# Altium PCB Power_Supply_Board.PcbDoc (part 1 of 2)
Units mm, origin at the board's own origin, x right, y up, seen from the top; angles counter-clockwise.
Board outline 32 x 28 mm, 4 copper layers (Top Layer, IN_T, IN_B, Bottom Layer), stack 1.57 mm thick; 32 components, 16 nets, 98 pads, 34 vias.
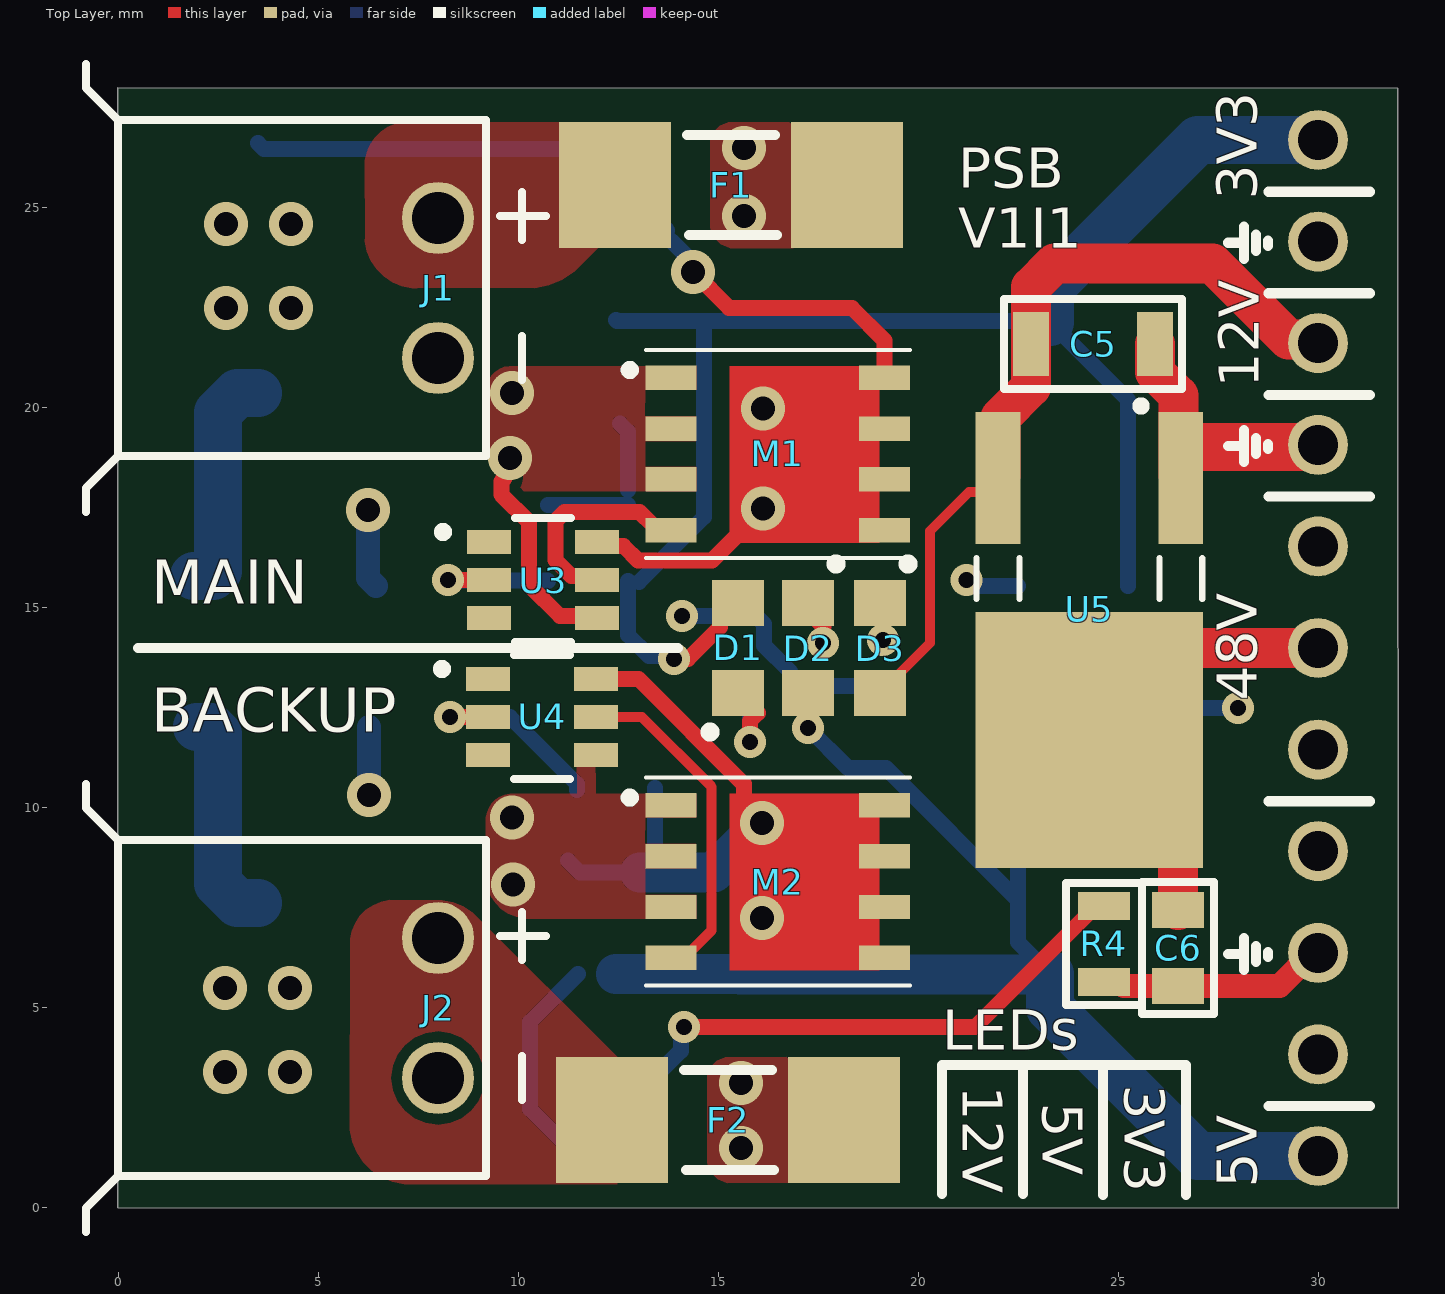
[diagram p0: Top Layer view]
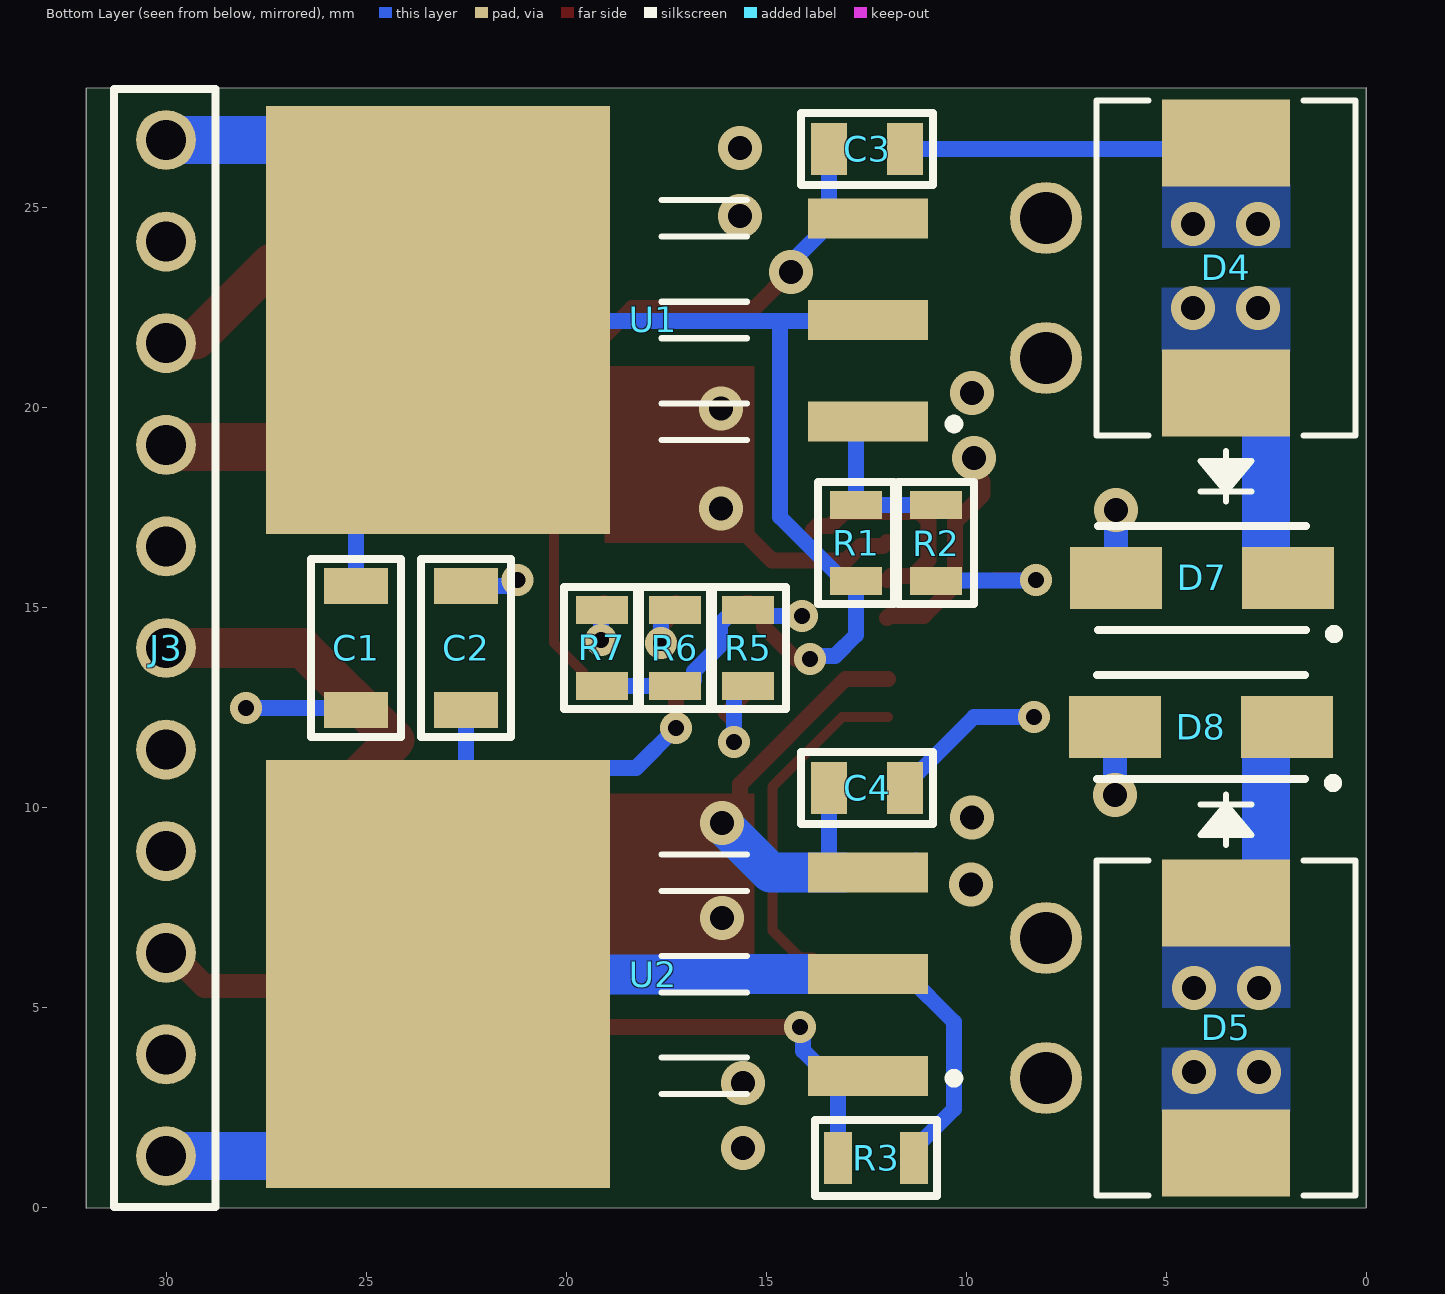
[diagram p1: Bottom Layer view, seen from below]
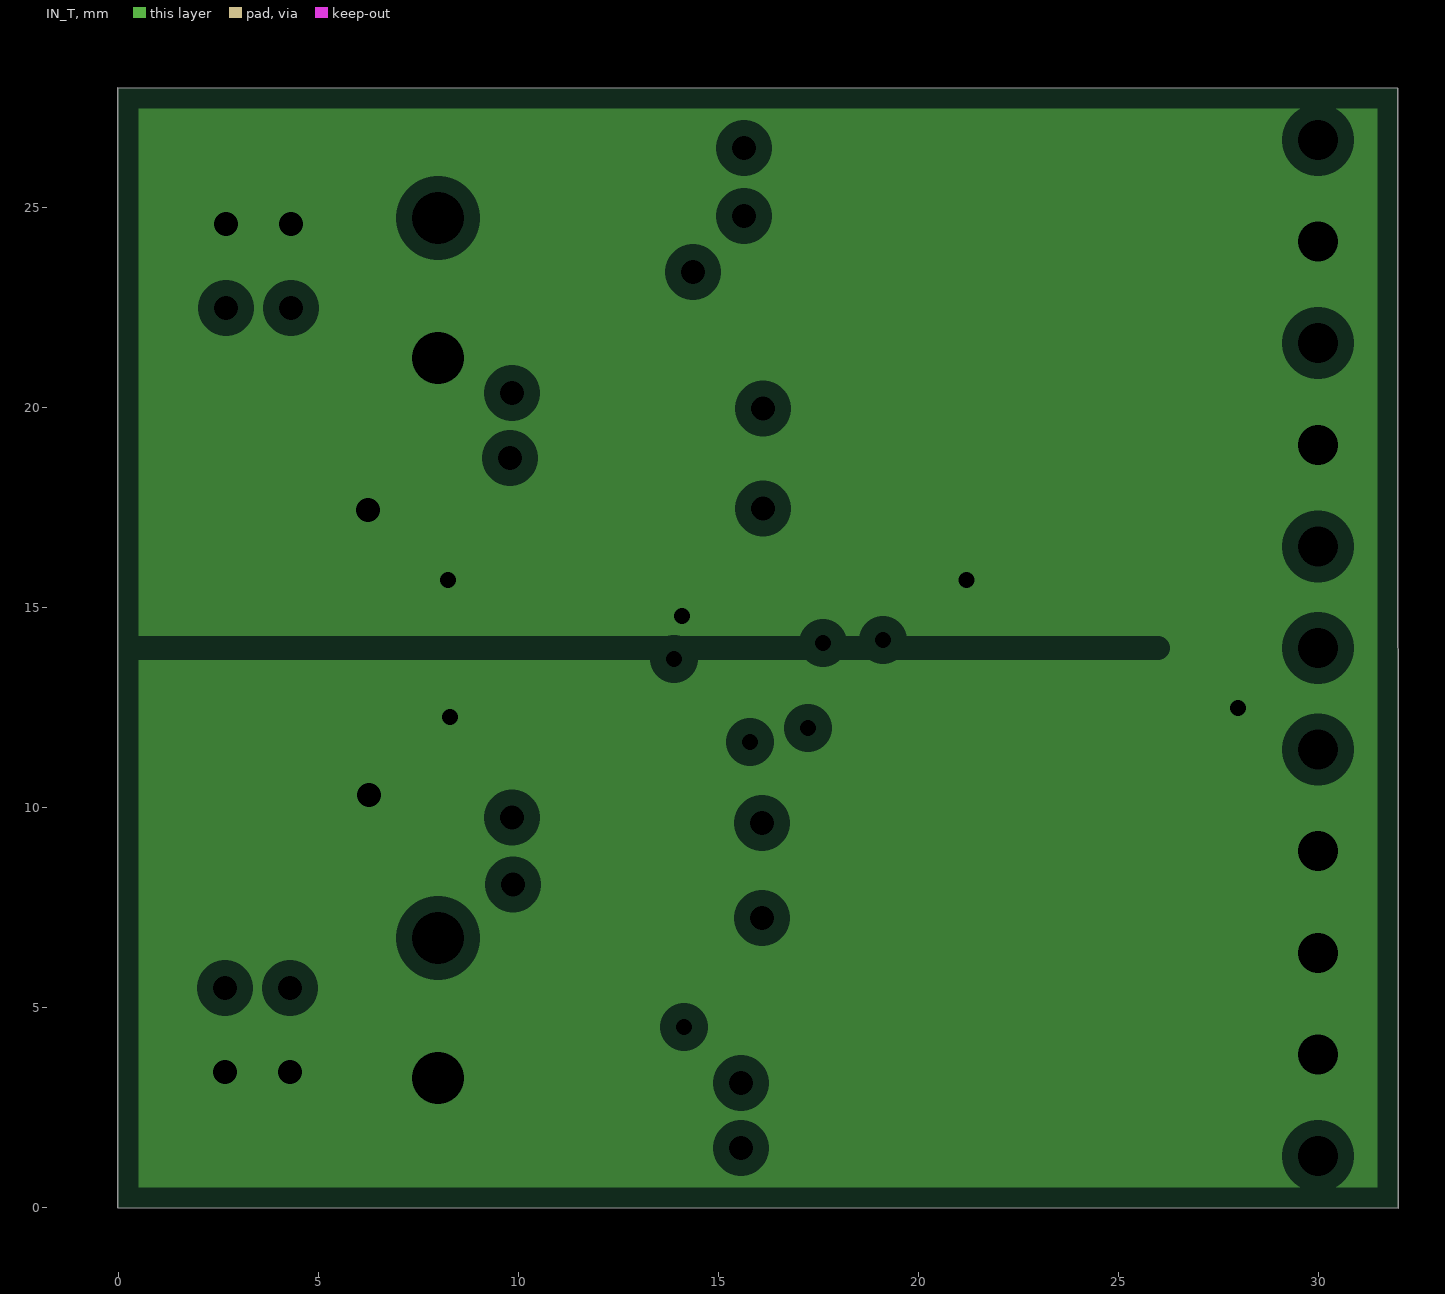
[diagram p2: IN_T, clearances drawn from the general rule]
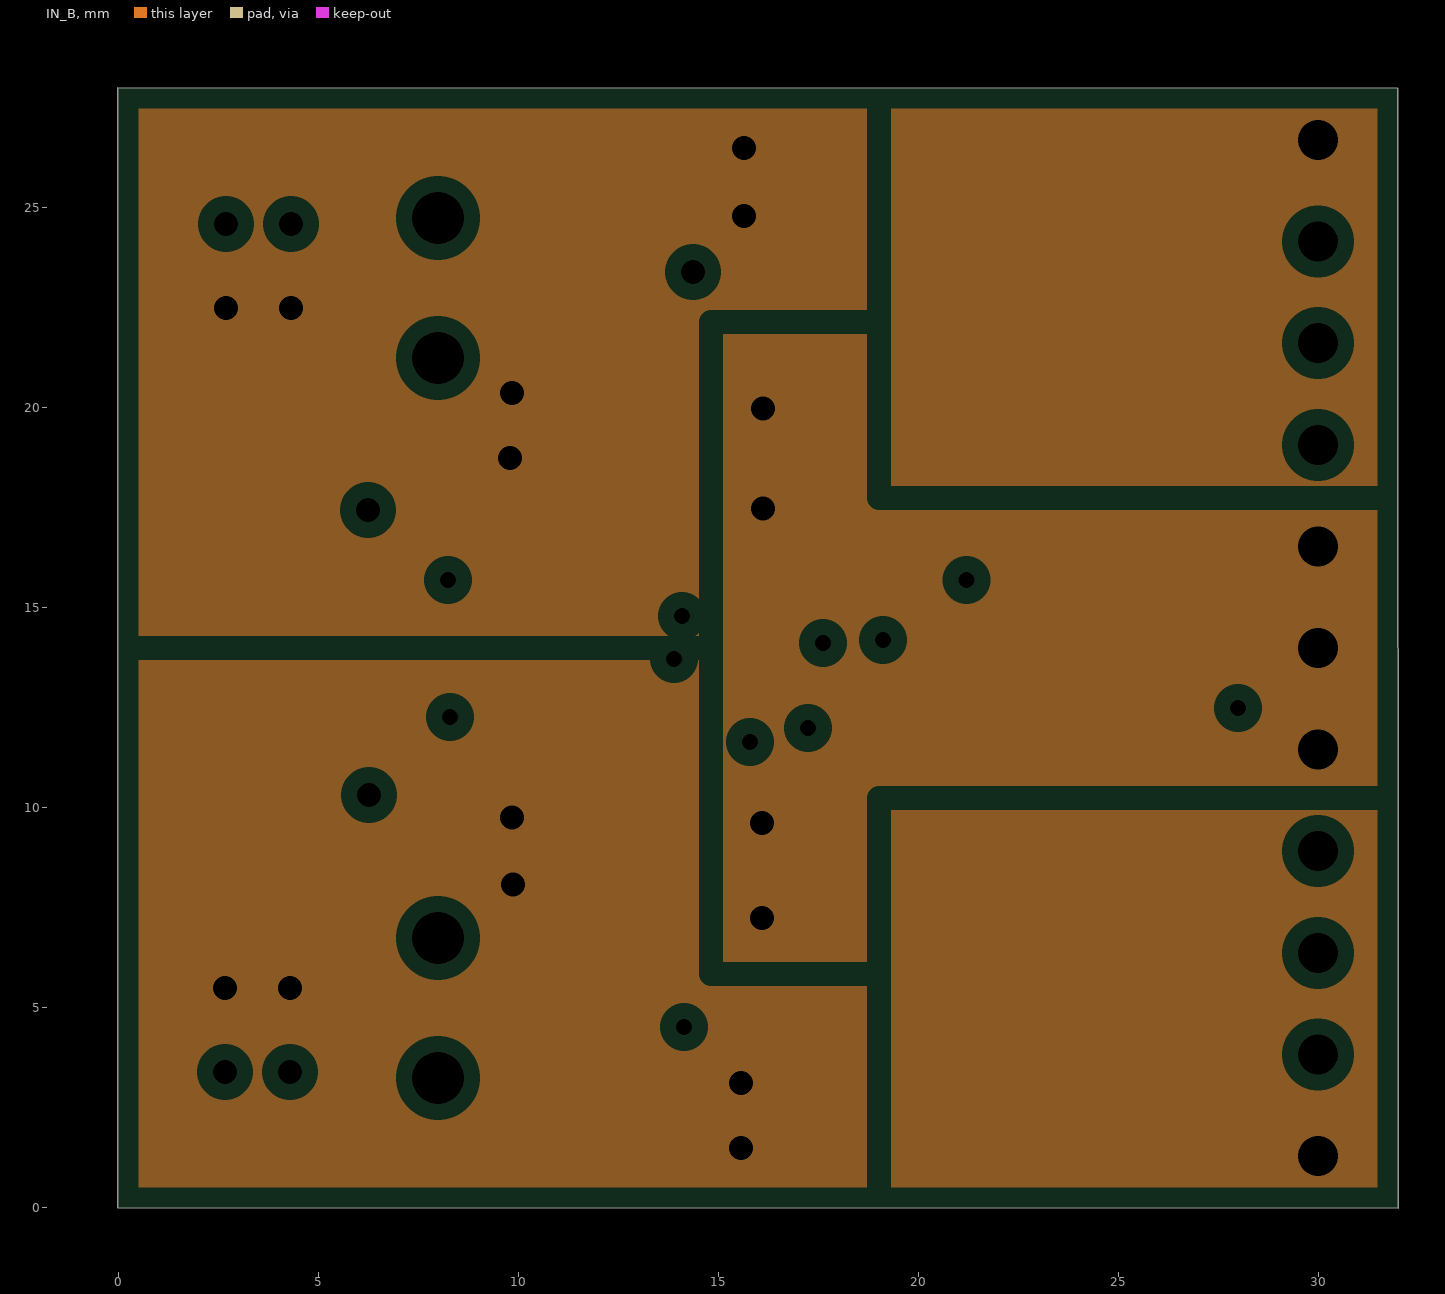
[diagram p3: IN_B, clearances drawn from the general rule]
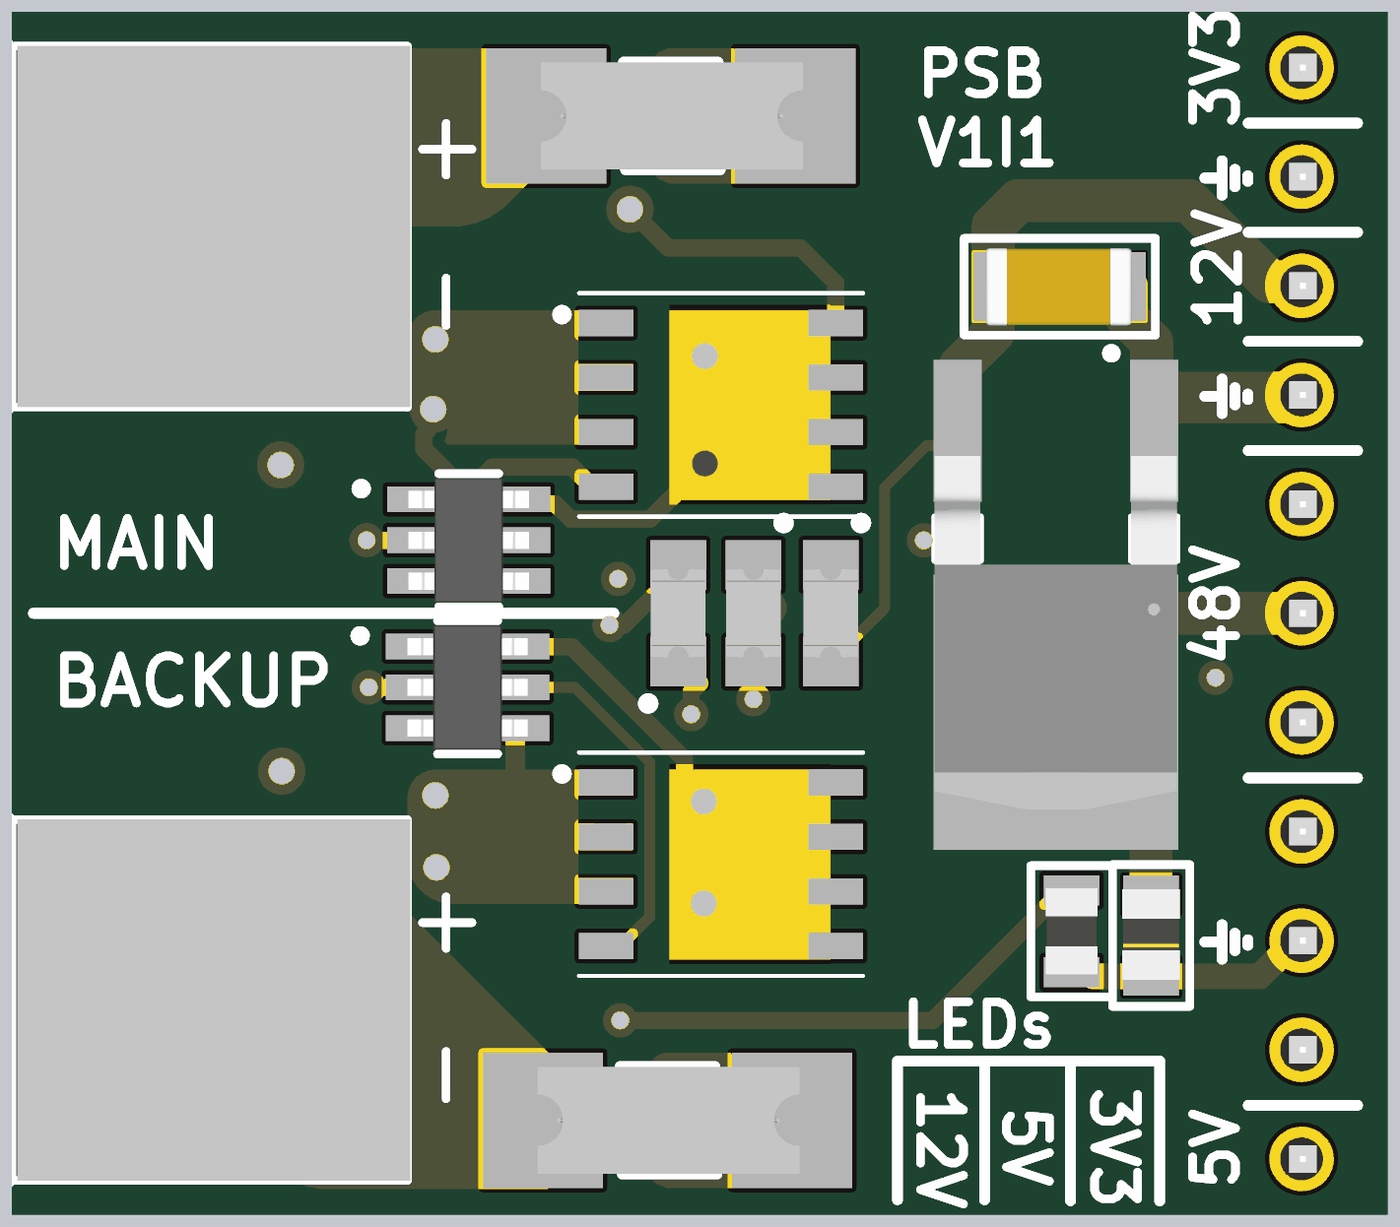
[diagram p4: 3D render of the assembled board from above, using the file's embedded part models]
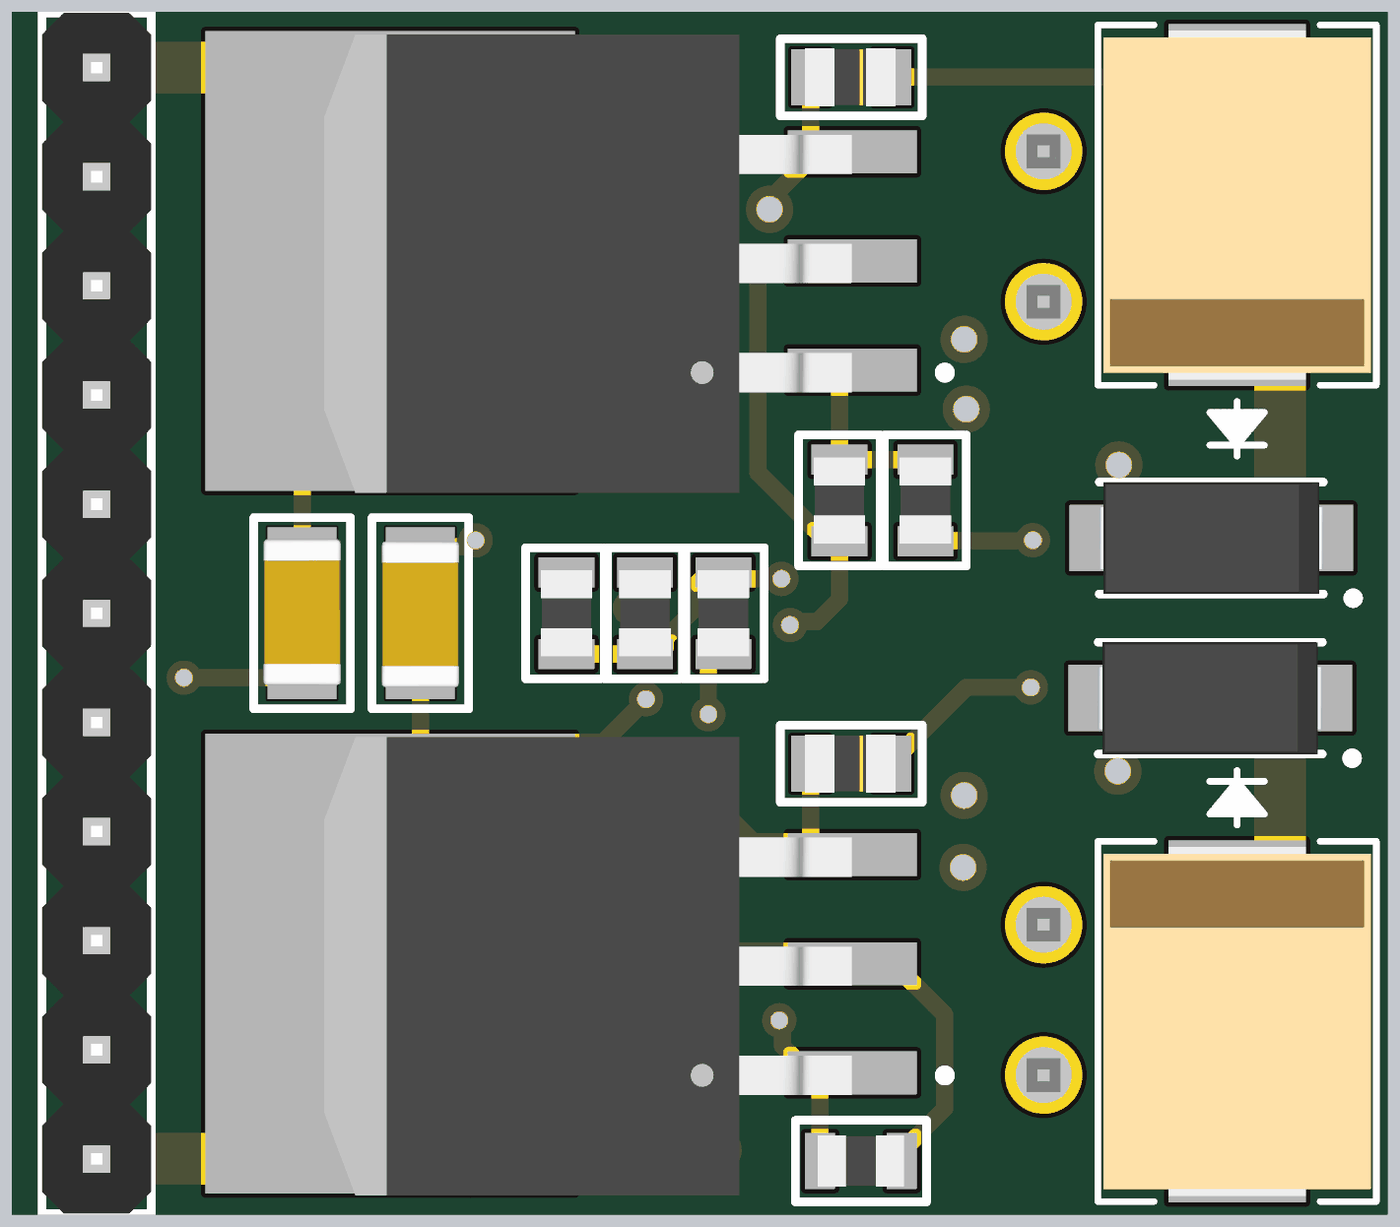
[diagram p5: 3D render of the assembled board from below, using the file's embedded part models]

## Layer stack, top to bottom
Top Solder: solder mask 0.0102, Solder Resist, Dk 3.5
Top Layer: signal copper 0.035
Dielectric 2: prepreg 0.2, PP-006, Dk 4.7
IN_T: plane copper 0.035, net GND
Dielectric 1: core 1.03, Core-009, Dk 4.6
IN_B: plane copper 0.035, net (Multiple Nets)
Dielectric 3: prepreg 0.2, PP-006, Dk 4.7
Bottom Layer: signal copper 0.035
Bottom Solder: solder mask 0.0102, Solder Resist, Dk 3.5

## Board outline
0,0 32,0 32,28 0,28

## Design rules (kind name [scope] priority, off if disabled: settings)
Clearance [All] p1: gap=0.254 ignorepadtopadclearanceinfootprint=FALSE except(0: Arc-Hole Track-Hole SMDPad-Hole THPad-Hole Via-Hole Fill-Hole Poly-Hole Region-Hole Text-Hole)
MinimumSolderMaskSliver [All] p1: minsoldermaskwidth=0.1
PlaneClearance [All] p1: clearance=0.4
PlaneConnect [All] p1: planeconnectstyle=Relief reliefexpansion=0.508 reliefentries=4 reliefconductorwidth=0.508 reliefairgap=0.254
PolygonConnect [All] p1: connectstyle=Direct reliefconductorwidth=0.254 reliefentries=4 polygonreliefangle="90 Angle" airgapwidth=0.254
RoutingVias Power [InNetClass('POWER')] p1: holewidth=0.6 width=1.1 viastyle="Through Hole" minholewidth=0.6 minwidth=1.1 maxholewidth=0.6 maxwidth=1.1
RoutingVias [All] p2: holewidth=0.4 width=0.8 viastyle="Through Hole" minholewidth=0.3 minwidth=0.7 maxholewidth=0.6 maxwidth=1
SilkToSilkClearance [All] p1: silktosilkclearance=0.05
SilkToSolderMaskClearance [IsPad] p1: minsilkscreentomaskgap=0.1 clearancetoexposedcopper=TRUE
SolderMaskExpansion [All] p1: expansion=0.102 istentingtop=FALSE
Width [All] p1: maxlimit=1.2 minlimit=0.254 preferedwidth=0.6 minimp=50.000000 maximp=50.000000 favimp=50.000000
25 further rules are at their usual default settings.

## Classes and differential pairs
net class POWER: +48_BACKUP +48_MAIN +48_PROT

## Components (designator, comment, footprint, x,y, rotation, side; value= is the part's Value field where it differs from the comment)
C1 "10uF 35V" "Capacitor 1206" 25.25,14 r90 bottom
C2 "10uF 35V" "Capacitor 1206" 22.5,14 r270 bottom
C3 "1uF 100V" C0805 12.475,26.475 r0 bottom
C4 "1uF 100V" C0805 12.475,10.5 r0 bottom
C5 "10uF 35V" "Capacitor 1206" 24.375,21.6 r180 top locked
C6 "1uF 100V" C0805 26.5,6.5 r90 top
D1 "Green Led" "Led Green 0805  Dialight 5988" 15.5,14 r90 top
D2 "Green Led" "Led Green 0805  Dialight 5988" 17.25,14 r270 top
D3 "Green Led" "Led Green 0805  Dialight 5988" 19.05,14 r270 top
D4 "TVS 58V 1.5kW" "TVS SMCJSeries" 3.5,23.5 r90 bottom locked
D5 "TVS 58V 1.5kW" "TVS SMCJSeries" 3.5,4.5 r270 bottom locked
D7 "56V" "DIODE ZENER 56V 1SMA5943BT3G" 4.1,15.75 r0 bottom locked
D8 "56V" "DIODE ZENER 56V 1SMA5943BT3G" 4.125,12.025 r0 bottom locked
F1 "Fuse 6.3A" "FUSE SMD 6.3A SF-2410FP630W" 15.325,25.575 r0 top
F2 "Fuse 6.3A" "FUSE SMD 6.3A SF-2410FP630W" 15.25,2.2 r0 top
J1 "39502-1002" "Terminal Block 0395021002" 8,23 r270 top locked
J2 "39502-1002" "Terminal Block 0395021002" 8,5 r270 top locked
J3 "Header 11 100mils" "Header 11 pos Male 2.54" 30,14 r270 bottom locked
M1 "NMOS FDMS86540" "NMOS FDMS86540" 16.495,18.85 r270 top
M2 "NMOS FDMS86540" "NMOS FDMS86540" 16.495,8.16 r270 top
R1 "82R 1%" "Resistor R0805 Panasonic ERJ" 12.75,16.625 r270 bottom
R2 "133R 1%" "Resistor R0805 Panasonic ERJ" 10.75,16.625 r90 bottom
R3 "82R 1%" "Resistor R0805 Panasonic ERJ" 12.25,1.25 r180 bottom
R4 "243R 1%" "Resistor R0805 Panasonic ERJ" 24.65,6.6 r90 top
R5 "1K 0.125W" "Resistor R0805 Panasonic ERJ" 15.45,14 r270 bottom
R6 "2k2" "Resistor R0805 Panasonic ERJ" 17.275,14 r90 bottom
R7 "7k5 1%" "Resistor R0805 Panasonic ERJ" 19.1,14 r90 bottom
U1 "Lin regulator" "Linear TL783CKTTR" 17.825,22.2 r90 bottom locked
U2 "Lin regulator" "Linear TL783CKTTR" 17.825,5.844 r90 bottom
U3 "ORing" LM5050 10.625,15.7 r0 top locked
U4 "ORing" LM5050 10.6,12.275 r0 top locked
U5 "12V lin" "Linear ZXTR2012K" 24.286,11.697 r180 top locked

## Footprints (in the part's own frame and the unit in brackets; to place one, negate y for a bottom-side part, rotate by r counter-clockwise, add the part's x,y. Pads: shape width x height; smd on the part's side, far side on the other; paste and mask are expansions set on the pad)
C0805 [mm]
  rect 0.9x1.3 smd mask+0.07: 1(-0.95,0) 2(0.95,0)
  silkscreen extent -1.65,-0.9 1.65,0.9, body extent -1.03,-0.67 1.08,0.67, height 1.35
"Capacitor 1206" [mm]
  rect 0.9x1.6 smd mask+0.05: 1(-1.55,0) 2(1.55,0)
  silkscreen extent -2.22,-1.12 2.22,1.12, body extent -1.68,-0.9 1.72,0.9, height 1.81
"DIODE ZENER 56V 1SMA5943BT3G" [mm]
  rect 2.3x1.55 smd: 1(-2.15,0) 2(2.15,0)
  silkscreen extent -3.4,-1.3 2.61,1.5, body extent -2.61,-1.3 2.61,1.3, height 2.2
"FUSE SMD 6.3A SF-2410FP630W" [mm]
  rect 2.8x3.15 smd: 1(-2.9,0) 2(2.9,0)
  silkscreen extent -1.1,-1.25 1.15,1.25, body extent -3.02,-1.24 3.08,1.25, height 2.16
"Header 11 pos Male 2.54" [mm]
  round 1.5 hole 1: 1(-12.7,0) 2(-10.16,0) 3(-7.62,0) 4(-5.08,0) 5(-2.54,0) 6(0,0) 7(2.54,0) 8(5.08,0) 9(7.62,0) 10(10.16,0) 11(12.7,0)
  silkscreen extent -13.97,-1.3 13.97,1.24, body extent -13.97,-1.3 13.97,1.24, height 8.39
"Led Green 0805  Dialight 5988" [mm]
  rect 1.15x1.3 smd: 1(-1.125,0) 2(1.125,0)
  silkscreen extent -2.21,0.59 -1.99,0.81, body extent -1.03,-0.63 1.03,0.64, height 0.74
"Linear TL783CKTTR" [mm]
  rect 1x3 smd: 1(-2.54,-5.376) 2(0,-5.376) 3(2.54,-5.376)
  rect 10.7x8.6 smd: 2(0,5.376)
  silkscreen extent -3,-7.63 3,-0.21, body extent -5.39,-5.36 5.27,6.91, height 1.7
"Linear ZXTR2012K" [mil]
  rect 44x130 smd paste+0 mask+0: 1(-90,-258) 3(90,-258)
  rect 224x252 smd paste+0 mask+0: 2(0,0)
  silkscreen extent -111,-332 111,-139, body extent -111,-235 111,89, height 94
LM5050 [mm]
  rect 1.1x0.6 smd: 1(-1.35,0.95) 2(-1.35,0) 3(-1.35,-0.95) 4(1.35,-0.95) 5(1.35,0) 6(1.35,0.95)
  silkscreen extent -2.6,-1.55 0.7,1.55, body extent -1.4,-1.45 1.4,1.45, height 0.97
"NMOS FDMS86540" [mm]
  rect 0.61x1.27 smd: 1(-1.905,-2.67) 2(-0.635,-2.67) 3(0.635,-2.67) 4(1.905,-2.67) 5(1.905,2.67) 6(0.635,2.67) 7(-0.635,2.67) 8(-1.905,2.67)
  Top Layer region: -2.205,-1.205 2.22,-1.205 2.22,2.545 -2.205,2.545
  silkscreen extent -2.6,-3.8 2.6,3.3, body extent -2.6,-3.3 2.6,3.3, height 1.1
"Resistor R0805 Panasonic ERJ" [mm]
  rect 0.7x1.3 smd: 1(-0.95,0) 2(0.95,0)
  silkscreen extent -1.53,-0.95 1.53,0.95, body extent -1,-0.6 1,0.6, height 0.71
"Terminal Block 0395021002" [mm]
  round 1.8 hole 1.3: 1(-1.75,0) 2(1.75,0)
  silkscreen extent -5.6,-8.8 5.6,2.7, body extent -4.2,-7.87 4.2,1.27, height 6.87
"TVS SMCJSeries" [mil]
  rect 86x126 smd: 1(-123,0) 2(123,0)
  silkscreen extent -230,-128 165,128, body extent -160,-123 160,123, height 105

## Part data
C1 C2 C5: library part GMK316AB7106KL-TR, "CAP CER 10UF 35V X7R 1206", Capacitance=10uF, Case Code (Imperial)=1206, Case Code (Metric)=3216, Dielectric=X7R, Manufacturer="Taiyo Yuden", Max Operating Temperature=125°C, Min Operating Temperature=-55°C, Package Quantity=2000, Supplier Part Number 1=587-3007-6-ND, Tolerance=10%, Voltage Rating=35V, Case/Package=1206, ComponentLink1Description=http://www.farnell.com/datasheets/1497285.pdf, ComponentLink1URL=http://www.farnell.com/datasheets/1497285.pdf, ComponentLink2Description=https://media.digikey.com/pdf/Data%20Sheets/Taiyo%20Yuden%20PDFs%20URL%20links/GMK316AB7106KL-TR_ProdSpec.pdf, ComponentLink2URL=https://media.digikey.com/pdf/Data%20Sheets/Taiyo%20Yuden%20PDFs%20URL%20links/GMK316AB7106KL-TR_ProdSpec.pdf, Composition=Ceramic, Height=1.6mm, Length=0.126inch, Manufacturer Part Number=GMK316AB7106KL-TR, Mount="Surface Mount", Packaging="Tape and Reel", Pricing 1="1=0.61, 10=0.431, 100=0.2841, 500=0.21046, 1000=0.17888 (USD)", REACH SVHC="No SVHC", Stock 1=2000, Supplier 1=Digi-Key, Termination=SMD/SMT, Thickness=0.071inch, Voltage Rating (DC)=35V, Width=1.6mm
C3 C4 C6: library part GRM21BC72A105KE01L, "Cap Ceramic 1uF 100V X7S 10% Pad SMD 0805 125C T/R", Capacitance=1uF, Dielectric=X7S, Manufacturer=Murata, Supplier Part Number 1=490-14464-1-ND, Tolerance=10%, Voltage Rating (DC)=100V, Category="Ceramic Capacitors", ComponentLink1Description=http://search.murata.co.jp/Ceramy/image/img/A01X/G101/ENG/GRM21BC72A105KE01-01.pdf?src-supplier=Digi-Key, ComponentLink1URL=http://search.murata.co.jp/Ceramy/image/img/A01X/G101/ENG/GRM21BC72A105KE01-01.pdf?src-supplier=Digi-Key, ComponentLink2Description=https://search.murata.co.jp/Ceramy/image/img/A01X/G101/ENG/GRM21BC72A105KE01-01.pdf?src-supplier=Digi-Key, ComponentLink2URL=https://search.murata.co.jp/Ceramy/image/img/A01X/G101/ENG/GRM21BC72A105KE01-01.pdf?src-supplier=Digi-Key, Length=2mm, Manufacturer Part Number=GRM21BC72A105KE01L, Pricing 1="1=0,46000, 10=0,32600, 100=0,21450, 500=0,15888, 1000=0,13505 (USD)", RoHS=No, Stock 1=18361, Supplier 1=Digi-Key, Thickness=1.25mm, Width=1.25mm
D1 D2 D3: library part 598-8170-107F, "LED 0805 GREEN 20MCD", Case Code (Imperial)=0805, Case Code (Metric)=2012, Color=Green, Forward Current=20mA, Forward Voltage=2.4V, Lens Color=Colorless,Clear, Manufacturer=Dialight, Max Operating Temperature=85°C, Min Operating Temperature=-30°C, Package Quantity=3000, Power Dissipation=60mW, Reverse Voltage=5V, Supplier Part Number 1=350-2044-1-ND, Case/Package=0805, Category=LEDs, ComponentLink1Description=https://datasheet.ciiva.com/11774/0900766b80ae2984-11774107.pdf?src-supplier=RSComponents, ComponentLink1URL=https://datasheet.ciiva.com/11774/0900766b80ae2984-11774107.pdf?src-supplier=RSComponents, ComponentLink2Description=https://datasheet.ciiva.com/15117/getdatasheetpartid-104614-15117453.pdf?src-supplier=Verical, ComponentLink2URL=https://datasheet.ciiva.com/15117/getdatasheetpartid-104614-15117453.pdf?src-supplier=Verical, ComponentLink3Description=https://datasheet.ciiva.com/2110/smt-selector-guide-2110053.pdf?src-supplier=Digi-Key, ComponentLink3URL=https://datasheet.ciiva.com/2110/smt-selector-guide-2110053.pdf?src-supplier=Digi-Key, ComponentLink4Description=https://datasheet.ciiva.com/1243/25662-1243901.pdf?src-supplier=Element14, ComponentLink4URL=https://datasheet.ciiva.com/1243/25662-1243901.pdf?src-supplier=Element14, ComponentLink5Description=https://datasheet.ciiva.com/30132/mdei5980805-a-w-30132781.pdf?src-supplier=Onlinecomponents.com, ComponentLink5URL=https://datasheet.ciiva.com/30132/mdei5980805-a-w-30132781.pdf?src-supplier=Onlinecomponents.com, ComponentLink6Description=https://datasheet.ciiva.com/2110/smt-selector-guide-2110051.pdf?src-supplier=Digi-Key, ComponentLink6URL=https://datasheet.ciiva.com/2110/smt-selector-guide-2110051.pdf?src-supplier=Digi-Key, ComponentLink7Description=https://datasheet.ciiva.com/2110/smt-selector-guide-2110052.pdf?src-supplier=Digi-Key, ComponentLink7URL=https://datasheet.ciiva.com/2110/smt-selector-guide-2110052.pdf?src-supplier=Digi-Key, ComponentLink8Description=https://datasheet.ciiva.com/15965/mdei5980805-a-w-15965496.pdf?src-supplier=Onlinecomponents.com, ComponentLink8URL=https://datasheet.ciiva.com/15965/mdei5980805-a-w-15965496.pdf?src-supplier=Onlinecomponents.com, ComponentLink9Description=https://datasheet.ciiva.com/22748/1484480-22748121.pdf?src-supplier=Element14, ComponentLink9URL=https://datasheet.ciiva.com/22748/1484480-22748121.pdf?src-supplier=Element14, ComponentLink10Description=https://datasheet.ciiva.com/1243/25662-1243902.pdf?src-supplier=Element14, ComponentLink10URL=https://datasheet.ciiva.com/1243/25662-1243902.pdf?src-supplier=Element14, Depth=1.25mm, Dominant Wavelength=570nm, Height=0.8mm, Illumination Color=Green, Lead Free="Lead Free", Length=2mm, Lens Size=1.25mm, Lens Style=Flat,Rectangular,Clear,Diffused,Colorless, Lens Transparency=Clear, Luminous Intensity=20mcd, Manufacturer Part Number=598-8170-107F, Mount="Surface Mount", Number of Elements=1, Number of LEDs=1, Number of Pins=2, Packaging="Tape and Reel", Pricing 1="1=0,39000, 10=0,28200, 100=0,12520, 500=0,08766, 1000=0,07201 (USD)", Radiation Hardening=No, REACH SVHC="No SVHC", RoHS=Yes, Stock 1=101069, Supplier 1=Digi-Key, Test Current=20mA, Viewing Angle=140°, Wavelength=570nm, Width=1.25mm
D4 D5: library part SMCJ58CA, "TVS DIODE 58VWM 93.6VC SMC", Breakdown Voltage=64.4V, Clamping Voltage=93.6V, Leakage Current=1uA, Manufacturer=Littelfuse, Max Breakdown Voltage=71.2V, Max Operating Temperature=150°C, Max Power Dissipation=6.5W, Max Surge Current=16.1A, Min Operating Temperature=-65°C, Operating Supply Voltage=58V, Package Quantity=3000, Peak Pulse Power=1.5kW, Power Line Protection=No, Supplier Part Number 1=SMCJ58CALFCT-ND, Test Current=1mA, Category="TVS Diodes", ComponentLink1Description=https://datasheet.ciiva.com/16388/smcj58ca-16388266.pdf?src-supplier=Future+Electronics, ComponentLink1URL=https://datasheet.ciiva.com/16388/smcj58ca-16388266.pdf?src-supplier=Future+Electronics, ComponentLink2Description=https://datasheet.ciiva.com/4509/littelfuse-tvs-diode-smcj-62645-4509016.pdf?src-supplier=Mouser, ComponentLink2URL=https://datasheet.ciiva.com/4509/littelfuse-tvs-diode-smcj-62645-4509016.pdf?src-supplier=Mouser, ComponentLink3Description=https://datasheet.ciiva.com/332/littelfuse-tvs-diode-smcj-datasheet-pdf-332399.pdf?src-supplier=Digi-Key, ComponentLink3URL=https://datasheet.ciiva.com/332/littelfuse-tvs-diode-smcj-datasheet-pdf-332399.pdf?src-supplier=Digi-Key, ComponentLink4Description=https://datasheet.ciiva.com/332/littelfuse-tvs-diode-smcj-datasheet-pdf-332397.pdf?src-supplier=Digi-Key, ComponentLink4URL=https://datasheet.ciiva.com/332/littelfuse-tvs-diode-smcj-datasheet-pdf-332397.pdf?src-supplier=Digi-Key, ComponentLink5Description=https://datasheet.ciiva.com/332/littelfuse-tvs-diode-smcj-datasheet-pdf-332398.pdf?src-supplier=Digi-Key, ComponentLink5URL=https://datasheet.ciiva.com/332/littelfuse-tvs-diode-smcj-datasheet-pdf-332398.pdf?src-supplier=Digi-Key, Composition=Zener, Direction=Bidirectional, Height=2.62mm, Lead Free="Lead Free", Length=8.13mm, Manufacturer Part Number=SMCJ58CA, Min Breakdown Voltage=64.4V, Mount="Surface Mount", Number of Bidirectional Channels=1, Number of Channels=1, Number of Elements=1, Number of Pins=2, Packaging="Tape and Reel", Peak Pulse Current=16.1A, Polarity=Bidirectional, Power Dissipation=1.5kW, Pricing 1="1=0,61000, 10=0,52500, 25=0,49000, 100=0,36400, 250=0,34580, 500=0,28420, 1000=0,23100 (USD)", REACH SVHC="No SVHC", Reverse Breakdown Voltage=64.4V, Reverse Standoff Voltage=58V, RoHS=Yes, Stock 1=5077, Supplier 1=Digi-Key, Termination=SMD/SMT, Voltage Rating (DC)=58V, Width=6.22mm
D7 D8: library part 1SMA5943BT3G, "Diodes Zener 56V 1.5W", Breakdown Voltage=58.8V, Case/Package=SMA, Forward Voltage=1.5V, Manufacturer="ON Semiconductor", Max Operating Temperature=150°C, Max Power Dissipation=1.5W, Max Reverse Leakage Current=500nA, Min Operating Temperature=-65°C, Package Quantity=1, Power Dissipation=500mW, Supplier Part Number 1=1SMA5943BT3GOSCT-ND, Test Current=6.7mA, Tolerance=5%, Zener Current=27mA, Category="Zener Diodes", ComponentLink1Description=https://datasheet.ciiva.com/15142/getdatasheetpartid-53895-15142138.pdf?src-supplier=Verical, ComponentLink1URL=https://datasheet.ciiva.com/15142/getdatasheetpartid-53895-15142138.pdf?src-supplier=Verical, ComponentLink2Description=https://datasheet.ciiva.com/4733/1sma5913bt3-d-4733669.pdf?src-supplier=Mouser, ComponentLink2URL=https://datasheet.ciiva.com/4733/1sma5913bt3-d-4733669.pdf?src-supplier=Mouser, ComponentLink3Description=https://datasheet.ciiva.com/16311/1sma5913bt3-d-16311897.pdf?src-supplier=Future+Electronics, ComponentLink3URL=https://datasheet.ciiva.com/16311/1sma5913bt3-d-16311897.pdf?src-supplier=Future+Electronics, ComponentLink4Description=https://datasheet.ciiva.com/6388/1sma5913bt3-d-6388892.pdf?src-supplier=Digi-Key, ComponentLink4URL=https://datasheet.ciiva.com/6388/1sma5913bt3-d-6388892.pdf?src-supplier=Digi-Key, ComponentLink5Description=https://datasheet.ciiva.com/6388/1sma5913bt3-d-6388890.pdf?src-supplier=Digi-Key, ComponentLink5URL=https://datasheet.ciiva.com/6388/1sma5913bt3-d-6388890.pdf?src-supplier=Digi-Key, ComponentLink6Description=https://datasheet.ciiva.com/6388/1sma5913bt3-d-6388891.pdf?src-supplier=Digi-Key, ComponentLink6URL=https://datasheet.ciiva.com/6388/1sma5913bt3-d-6388891.pdf?src-supplier=Digi-Key, Element Configuration=Single, Halogen Free="Halogen Free", Height=2.05mm, Impedance=86R, Lead Free="Lead Free", Length=4.57mm, Manufacturer Part Number=1SMA5943BT3G, Number of Pins=2, Packaging="Tape and Reel", Peak Reverse Current=500nA, Power Rating=1.5W, Pricing 1="1=0,43000, 10=0,32200, 25=0,29040, 100=0,15310, 250=0,15152, 500=0,13570, 1000=0,10560, 2500=0,09662 (USD)", Radiation Hardening=No, REACH SVHC="No SVHC", RoHS=Yes, Stock 1=25856, Supplier 1=Digi-Key, Voltage Rating (DC)=56V, Voltage Tolerance=5%, Width=2.92mm, Working Voltage=56V, Zener Voltage=56V
F1 F2: library part SF-2410FP630W-2, "Fuse 2410 SMD FAST-ACTING PRECISION W", Case Code (Imperial)=2410, Case Code (Metric)=6125, Current Rating=6.3A, DC Cold Resistance=10mR, Manufacturer=Bourns, Max Operating Temperature=125°C, Min Operating Temperature=-55°C, Supplier Part Number 1=SF-2410FP630W-2CT-ND, Voltage Rating (AC)=125V, Approvals=UL, Case/Package=2410, ComponentLink1Description=https://www.bourns.com/docs/Product-Datasheets/SF-2410FPxxxW.pdf?src-supplier=Digi-Key, ComponentLink1URL=https://www.bourns.com/docs/Product-Datasheets/SF-2410FPxxxW.pdf?src-supplier=Digi-Key, Fuse Type="Board Mount (Cartridge Style Excluded)", Manufacturer Part Number=SF-2410FP630W-2, Mount="Surface Mount", Packaging="Tape and Reel", Pricing 1="1=1,16000, 5=1,12600, 10=1,05300, 50=0,87120, 100=0,72600, 250=0,70784, 500=0,59896, 1000=0,52635 (USD)", RoHS=No, Stock 1=1970, Supplier 1=Digi-Key, Voltage Rating (DC)=125V
J1 J2: "Terminal Block,2 Contacts,PIN ;RoHS Compliant: Yes", Color=Black, Contact Resistance=8mR, Current Rating=8A, Flammability Rating="UL94 V-0", Manufacturer=Molex, Max Operating Temperature=105°C, Min Operating Temperature=-40°C, Package Quantity=1800, Supplier Part Number 1=WM7770-ND, Voltage Rating=300V, Category="Headers and Wire Housings", ComponentLink1Description=https://datasheet.ciiva.com/5192/0395021002-terminal-blocks-163773-5192965.pdf?src-supplier=Mouser, ComponentLink1URL=https://datasheet.ciiva.com/5192/0395021002-terminal-blocks-163773-5192965.pdf?src-supplier=Mouser, Contact Material=Brass, Contact Plating=Tin, ELV=Compliant, Halogen Free="Low Halogen", Housing Color=Black, Housing Material=Nylon, Lead Free="Lead Free", Length=8.4mm, Manufacturer Part Number=39502-1002, Mount="Through Hole", Number of Circuits=2, Number of Contacts=2, Number of Positions=2, Number of Rows=1, Orientation=Horizontal, Pitch=3.5mm, Pricing 1="1=0,58000, 10=0,54000, 100=0,41400, 500=0,36000, 1000=0,29700, 5000=0,26100, 10000=0,24300 (USD)", REACH SVHC="No SVHC", RoHS=Yes, Stock 1=12700, Supplier 1=Digi-Key, Termination="Through Hole", Width=9.2mm
J3: library part PREC011SAAN-RC, "HEADER 11 pins Male 2.54MM", Color=Black, Manufacturer=Sullins, Package Quantity=1, Supplier Part Number 1=S1012EC-11-ND, Category=Connectors, ComponentLink1Description=https://datasheet.ciiva.com/740/zrzczzzszzn-rc-st-11635-b-740834.pdf?src-supplier=Digi-Key, ComponentLink1URL=https://datasheet.ciiva.com/740/zrzczzzszzn-rc-st-11635-b-740834.pdf?src-supplier=Digi-Key, Connector Type="Male Pin", Contact Mating Length=0.23inch, Contact Plating=Tin, Manufacturer Part Number=PREC011SAAN-RC, Mount="Through Hole", Number of Positions=11, Number of Rows=1, Packaging=Bulk, Pitch=0.1inch, Pricing 1="1=0,26000, 10=0,24500, 25=0,20920, 50=0,18300, 100=0,16990, 250=0,15028, 500=0,14374 (USD)", RoHS=Yes, Stock 1=2584, Supplier 1=Digi-Key, Termination=Solder
M1 M2: library part FDMS86540, "MOSFET 60V N-Channel PowerTrench MOSFET", Continuous Drain Current (ID)=20A, Drain to Source Breakdown Voltage=60V, Drain to Source Resistance=3.4mR, Gate to Source Voltage (Vgs)=20V, Input Capacitance=6.435nF, Manufacturer="ON Semiconductor / Fairchild", Max Operating Temperature=150°C, Max Power Dissipation=2.5W, Min Operating Temperature=-55°C, Package Quantity=3000, Supplier Part Number 1=FDMS86540CT-ND, Category=MOSFETs, ComponentLink1Description=https://datasheet.ciiva.com/6374/fdms86540-6374392.pdf?src-supplier=Digi-Key, ComponentLink1URL=https://datasheet.ciiva.com/6374/fdms86540-6374392.pdf?src-supplier=Digi-Key, ComponentLink2Description=https://datasheet.ciiva.com/15044/fdms86540-15044107.pdf?src-supplier=Digi-Key, ComponentLink2URL=https://datasheet.ciiva.com/15044/fdms86540-15044107.pdf?src-supplier=Digi-Key, ComponentLink3Description=https://datasheet.ciiva.com/11176/fdms86540-11176218.pdf?src-supplier=Avnet, ComponentLink3URL=https://datasheet.ciiva.com/11176/fdms86540-11176218.pdf?src-supplier=Avnet, ComponentLink4Description=https://datasheet.ciiva.com/15044/fdms86540-15044106.pdf?src-supplier=Digi-Key, ComponentLink4URL=https://datasheet.ciiva.com/15044/fdms86540-15044106.pdf?src-supplier=Digi-Key, ComponentLink5Description=https://datasheet.ciiva.com/15044/fdms86540-15044108.pdf?src-supplier=Digi-Key, ComponentLink5URL=https://datasheet.ciiva.com/15044/fdms86540-15044108.pdf?src-supplier=Digi-Key, Drain to Source Voltage (Vdss)=60V, Element Configuration=Single, Fall Time=7.2ns, Height=1.05mm, Length=5mm, Manufacturer Part Number=FDMS86540, Mount="Surface Mount", Number of Elements=1, Number of Pins=8, Packaging="Tape and Reel", Power Dissipation=2.5W, Pricing 1="1=1,48000, 10=1,33200, 25=1,25640, 100=0,98010, 250=0,95496, 500=0,82930, 1000=0,70364 (USD)", Radiation Hardening=No, Rds On Max=3.4mR, Rise Time=16ns, RoHS=Yes, Stock 1=1340, Supplier 1=Digi-Key, Turn-Off Delay Time=32ns, Turn-On Delay Time=28ns, Weight=0.0681g, Width=5.75mm
R1 R3: library part ERJ6ENF82R0V, "Res Thick Film 0805  82R, 150 V, Thick Film, 125 mW", Case Code (Imperial)=0805, Case Code (Metric)=2012, Manufacturer=Panasonic, Max Operating Temperature=155°C, Max Power Dissipation=125mW, Min Operating Temperature=-55°C, Package Quantity=5000, Resistance=82R, Supplier Part Number 1=P82.0CCT-ND, Temperature Coefficient=100ppm/°C, Tolerance=1%, Voltage Rating=150V, Case/Package=0805, Category="Chip SMD Resistors", ComponentLink1Description=https://datasheet.ciiva.com/11821/0900766b80f80784-11821707.pdf?src-supplier=RSComponents, ComponentLink1URL=https://datasheet.ciiva.com/11821/0900766b80f80784-11821707.pdf?src-supplier=RSComponents, ComponentLink2Description=https://datasheet.ciiva.com/22674/1678782-22674437.pdf?src-supplier=Element14, ComponentLink2URL=https://datasheet.ciiva.com/22674/1678782-22674437.pdf?src-supplier=Element14, ComponentLink3Description=https://datasheet.ciiva.com/7909/426256-7909238.pdf?src-supplier=Element14, ComponentLink3URL=https://datasheet.ciiva.com/7909/426256-7909238.pdf?src-supplier=Element14, ComponentLink4Description=https://datasheet.ciiva.com/22699/1678782-22699126.pdf?src-supplier=Element14, ComponentLink4URL=https://datasheet.ciiva.com/22699/1678782-22699126.pdf?src-supplier=Element14, ComponentLink5Description=https://datasheet.ciiva.com/46444/1678782-46444824.pdf?src-supplier=Element14, ComponentLink5URL=https://datasheet.ciiva.com/46444/1678782-46444824.pdf?src-supplier=Element14, ComponentLink6Description=https://datasheet.ciiva.com/17208/aoa0000ce2-17208445.pdf?src-supplier=Avnet+Europe, ComponentLink6URL=https://datasheet.ciiva.com/17208/aoa0000ce2-17208445.pdf?src-supplier=Avnet+Europe, ComponentLink7Description=https://datasheet.ciiva.com/6137/426256-6137583.pdf?src-supplier=Farnell, ComponentLink7URL=https://datasheet.ciiva.com/6137/426256-6137583.pdf?src-supplier=Farnell, ComponentLink8Description=https://datasheet.ciiva.com/7909/426256-7909557.pdf?src-supplier=Element14, ComponentLink8URL=https://datasheet.ciiva.com/7909/426256-7909557.pdf?src-supplier=Element14, ComponentLink9Description=https://datasheet.ciiva.com/9187/aoa0000ce2-9187509.pdf?src-supplier=Avnet, ComponentLink9URL=https://datasheet.ciiva.com/9187/aoa0000ce2-9187509.pdf?src-supplier=Avnet, Composition="Thick Film", Contact Plating=Tin, Depth=1.25mm, Height=0.6mm, Length=2mm, Manufacturer Part Number=ERJ6ENF82R0V, Military Standard=Not, Mount="Surface Mount", Number of Pins=2, Number of Terminations=2, Packaging="Tape and Reel", Power Rating=125mW, Pricing 1="1=0,10000, 10=0,07300, 100=0,02820, 1000=0,01239, 2500=0,01070 (USD)", Radiation Hardening=No, REACH SVHC="No SVHC", RoHS=Yes, Stock 1=574630, Supplier 1=Digi-Key, Termination=SMD/SMT, Voltage Rating (DC)=150V, Weight=0.000194oz, Width=1.2mm
R2: library part ERJ-6ENF1330V, "Res Thick Film 0805 133R, 125 mW,  1%, 150 V", Case Code (Imperial)=0805, Case Code (Metric)=2012, Manufacturer=Panasonic, Max Operating Temperature=155°C, Max Power Dissipation=125mW, Min Operating Temperature=-55°C, Package Quantity=1, Resistance=133R, Supplier Part Number 1=P133CCT-ND, Temperature Coefficient=100ppm/°C, Tolerance=1%, Voltage Rating=150V, Case/Package=0805, Category="Chip SMD Resistors", ComponentLink1Description=https://datasheet.ciiva.com/24030/aoa0000ce2-24030873.pdf?src-supplier=Mouser, ComponentLink1URL=https://datasheet.ciiva.com/24030/aoa0000ce2-24030873.pdf?src-supplier=Mouser, ComponentLink2Description=https://datasheet.ciiva.com/22674/1678782-22674122.pdf?src-supplier=Element14, ComponentLink2URL=https://datasheet.ciiva.com/22674/1678782-22674122.pdf?src-supplier=Element14, ComponentLink3Description=https://datasheet.ciiva.com/22722/1678782-22722111.pdf?src-supplier=Farnell, ComponentLink3URL=https://datasheet.ciiva.com/22722/1678782-22722111.pdf?src-supplier=Farnell, ComponentLink4Description=https://datasheet.ciiva.com/30209/aoa0000ce2-30209679.pdf?src-supplier=Onlinecomponents.com, ComponentLink4URL=https://datasheet.ciiva.com/30209/aoa0000ce2-30209679.pdf?src-supplier=Onlinecomponents.com, ComponentLink5Description=https://datasheet.ciiva.com/46444/1678782-46444031.pdf?src-supplier=Element14, ComponentLink5URL=https://datasheet.ciiva.com/46444/1678782-46444031.pdf?src-supplier=Element14, ComponentLink6Description=https://datasheet.ciiva.com/22739/1678782-22739625.pdf?src-supplier=Element14, ComponentLink6URL=https://datasheet.ciiva.com/22739/1678782-22739625.pdf?src-supplier=Element14, Composition="Thick Film", Contact Plating=Tin, Depth=1.25mm, Features="Automotive AEC-Q200", Height=0.028inch, Height - Seated (Max)=0.028inch, Lead Free="Lead Free", Length=2mm, Manufacturer Part Number=ERJ-6ENF1330V, Military Standard=Not, Mount="Surface Mount", Number of Terminations=2, Packaging="Tape and Reel", Power Rating=125mW, Pricing 1="1=0,10000, 10=0,07200, 100=0,02750, 1000=0,01210, 2500=0,01045 (USD)", REACH SVHC="No SVHC", RoHS=Yes, Stock 1=42590, Supplier 1=Digi-Key, Voltage Rating (DC)=150V, Width=0.049inch
R4: library part ERJ-6ENF2430V, "Res Thick Film 0805 243 R, 125 mW,  1%, 150 V", Case Code (Imperial)=0805, Case Code (Metric)=2012, Manufacturer=Panasonic, Max Operating Temperature=155°C, Max Power Dissipation=125mW, Min Operating Temperature=-55°C, Package Quantity=1, Resistance=243R, Supplier Part Number 1=P243CCT-ND, Temperature Coefficient=100ppm/°C, Tolerance=1%, Voltage Rating=150V, Case/Package=0805, Category="Chip SMD Resistors", ComponentLink1Description=https://datasheet.ciiva.com/9183/aoa0000ce2-9183885.pdf?src-supplier=Avnet, ComponentLink1URL=https://datasheet.ciiva.com/9183/aoa0000ce2-9183885.pdf?src-supplier=Avnet, ComponentLink2Description=https://datasheet.ciiva.com/28685/1678782-28685368.pdf?src-supplier=Element14, ComponentLink2URL=https://datasheet.ciiva.com/28685/1678782-28685368.pdf?src-supplier=Element14, ComponentLink3Description=https://datasheet.ciiva.com/15159/getdatasheetpartid-249650-15159067.pdf?src-supplier=Verical, ComponentLink3URL=https://datasheet.ciiva.com/15159/getdatasheetpartid-249650-15159067.pdf?src-supplier=Verical, ComponentLink4Description=https://datasheet.ciiva.com/30251/aoa0000ce2-30251515.pdf?src-supplier=Onlinecomponents.com, ComponentLink4URL=https://datasheet.ciiva.com/30251/aoa0000ce2-30251515.pdf?src-supplier=Onlinecomponents.com, ComponentLink5Description=https://datasheet.ciiva.com/24026/aoa0000ce2-24026236.pdf?src-supplier=Mouser, ComponentLink5URL=https://datasheet.ciiva.com/24026/aoa0000ce2-24026236.pdf?src-supplier=Mouser, ComponentLink6Description=https://datasheet.ciiva.com/46377/426256-46377788.pdf?src-supplier=Element14, ComponentLink6URL=https://datasheet.ciiva.com/46377/426256-46377788.pdf?src-supplier=Element14, ComponentLink7Description=https://datasheet.ciiva.com/16764/70260748-16764175.pdf?src-supplier=Allied+Electronics, ComponentLink7URL=https://datasheet.ciiva.com/16764/70260748-16764175.pdf?src-supplier=Allied+Electronics, ComponentLink8Description=https://datasheet.ciiva.com/46389/426256-46389327.pdf?src-supplier=Element14, ComponentLink8URL=https://datasheet.ciiva.com/46389/426256-46389327.pdf?src-supplier=Element14, Composition="Thick Film", Contact Plating=Tin, Depth=1.25mm, Features="Automotive AEC-Q200", Height=0.028inch, Lead Free="Lead Free", Length=2mm, Manufacturer Part Number=ERJ-6ENF2430V, Military Standard=Not, Mount="Surface Mount", Number of Terminations=2, Packaging="Tape and Reel", Power Rating=125mW, Pricing 1="1=0,10000, 10=0,07200, 100=0,02750, 1000=0,01210, 2500=0,01045 (USD)", Radiation Hardening=No, REACH SVHC=Unknown, RoHS=Yes, Stock 1=45725, Supplier 1=Digi-Key, Termination=SMD/SMT, Voltage Rating (DC)=150V, Width=0.049inch
R5: library part ERJ6ENF1001V, "Res 0805, 1K, 0.125W", Case Code (Imperial)=0805, Case Code (Metric)=2012, Manufacturer=Panasonic, Max Operating Temperature=155°C, Max Power Dissipation=125mW, Min Operating Temperature=-55°C, Package Quantity=1, Resistance=1kR, Supplier Part Number 1=P1.00KCDKR-ND, Temperature Coefficient=100ppm/°C, Tolerance=1%, Voltage Rating=150V, Case/Package=0805, ComponentLink1Description=http://www.jameco.com/Jameco/Products/ProdDS/1988962.pdf?src-supplier=Jameco, ComponentLink1URL=http://www.jameco.com/Jameco/Products/ProdDS/1988962.pdf?src-supplier=Jameco, ComponentLink2Description=http://www.farnell.com/datasheets/426256.pdf?src-supplier=Element14, ComponentLink2URL=http://www.farnell.com/datasheets/426256.pdf?src-supplier=Element14, ComponentLink3Description=http://www.alliedelec.com/m/d/623f45ff1957d936ff56d46fd1c28cac.pdf?src-supplier=Allied+Electronics, ComponentLink3URL=http://www.alliedelec.com/m/d/623f45ff1957d936ff56d46fd1c28cac.pdf?src-supplier=Allied+Electronics, ComponentLink4Description=http://www.farnell.com/datasheets/1678782.pdf?src-supplier=Element14, ComponentLink4URL=http://www.farnell.com/datasheets/1678782.pdf?src-supplier=Element14, ComponentLink5Description=http://industrial.panasonic.com/www-data/pdf/AOA0000/AOA0000CE2.pdf?src-supplier=Avnet, ComponentLink5URL=http://industrial.panasonic.com/www-data/pdf/AOA0000/AOA0000CE2.pdf?src-supplier=Avnet, ComponentLink6Description=http://industrial.panasonic.com/www-data/pdf/AOA0000/AOA0000CE2.pdf?src-supplier=Future+Electronics, ComponentLink6URL=http://industrial.panasonic.com/www-data/pdf/AOA0000/AOA0000CE2.pdf?src-supplier=Future+Electronics, ComponentLink7Description=http://industrial.panasonic.com/www-data/pdf/AOA0000/AOA0000CE2.pdf?src-supplier=Avnet+Asia, ComponentLink7URL=http://industrial.panasonic.com/www-data/pdf/AOA0000/AOA0000CE2.pdf?src-supplier=Avnet+Asia, Composition="Thick Film", Contact Plating=Tin, Depth=1.25mm, Features="Automotive AEC-Q200", Height=0.6mm, Lead Free="Lead Free", Length=2mm, Manufacturer Part Number=ERJ6ENF1001V, Military Standard=Not, Mount="Surface Mount", Number of Pins=2, Number of Terminations=2, Packaging="Tape and Reel", Power Rating=125mW, Pricing 1="1=0.1, 10=0.081, 100=0.0311, 1000=0.01367, 2500=0.01181 (USD)", Radiation Hardening=No, REACH SVHC="No SVHC", Stock 1=946321, Supplier 1=Digi-Key, Termination=SMD/SMT, Voltage Rating (DC)=150V, Width=0.049inch
R6: library part ERJ6ENF2201V, "Res Thick Film 00805 2.2K 1% 1/8W 0805", Case Code (Imperial)=0805, Case Code (Metric)=2012, Manufacturer=Panasonic, Max Operating Temperature=155°C, Max Power Dissipation=125mW, Min Operating Temperature=-55°C, Package Quantity=1, Resistance=2.2kR, Supplier Part Number 1=P2.20KCCT-ND, Temperature Coefficient=100ppm/°C, Tolerance=1%, Voltage Rating=150V, Case/Package=0805, ComponentLink1Description=https://datasheet.ciiva.com/16437/aoa0000ce2-16437797.pdf?src-supplier=Future+Electronics, ComponentLink1URL=https://datasheet.ciiva.com/16437/aoa0000ce2-16437797.pdf?src-supplier=Future+Electronics, ComponentLink2Description=https://datasheet.ciiva.com/46372/1678782-46372710.pdf?src-supplier=Element14, ComponentLink2URL=https://datasheet.ciiva.com/46372/1678782-46372710.pdf?src-supplier=Element14, ComponentLink3Description=https://datasheet.ciiva.com/24165/aoa0000ce2-24165591.pdf?src-supplier=Mouser, ComponentLink3URL=https://datasheet.ciiva.com/24165/aoa0000ce2-24165591.pdf?src-supplier=Mouser, ComponentLink4Description=https://datasheet.ciiva.com/46372/1678782-46372711.pdf?src-supplier=Element14, ComponentLink4URL=https://datasheet.ciiva.com/46372/1678782-46372711.pdf?src-supplier=Element14, ComponentLink5Description=https://datasheet.ciiva.com/22687/1678782-22687450.pdf?src-supplier=Element14, ComponentLink5URL=https://datasheet.ciiva.com/22687/1678782-22687450.pdf?src-supplier=Element14, ComponentLink6Description=https://datasheet.ciiva.com/7830/426256-7830748.pdf?src-supplier=Element14, ComponentLink6URL=https://datasheet.ciiva.com/7830/426256-7830748.pdf?src-supplier=Element14, ComponentLink7Description=https://datasheet.ciiva.com/22667/1678782-22667900.pdf?src-supplier=Element14, ComponentLink7URL=https://datasheet.ciiva.com/22667/1678782-22667900.pdf?src-supplier=Element14, ComponentLink8Description=https://datasheet.ciiva.com/7830/426256-7830990.pdf?src-supplier=Element14, ComponentLink8URL=https://datasheet.ciiva.com/7830/426256-7830990.pdf?src-supplier=Element14, Composition="Thick Film", Contact Plating=Tin, Depth=1.25mm, Features="Automotive AEC-Q200", Height=0.6mm, Lead Free="Lead Free", Length=2mm, Manufacturer Part Number=ERJ6ENF2201V, Military Standard=Not, Mount="Surface Mount", Number of Pins=2, Number of Terminations=2, Packaging="Tape and Reel", Power Rating=125mW, Pricing 1="1 = 0,10000, 10 = 0,08700, 100 = 0,03330, 1000 = 0,01464, 2500 = 0,01264 (USD)", Radiation Hardening=No, REACH SVHC="No SVHC", RoHS=Yes, Stock 1=189076, Supplier 1=Digi-Key, Termination=SMD/SMT, Voltage Rating (DC)=150V, Weight=0.000194oz, Width=0.049inch
R7: library part ERJ-6ENF7501V, "Res Thick Film 7.5k 125mW, ±1%;", Case Code (Imperial)=0805, Case Code (Metric)=2012, Manufacturer=Panasonic, Max Operating Temperature=155°C, Max Power Dissipation=125mW, Min Operating Temperature=-55°C, Package Quantity=1, Resistance=7.5kR, Supplier Part Number 1=P7.50KCCT-ND, Temperature Coefficient=100ppm/°C, Tolerance=1%, Voltage Rating=150V, Case/Package=0805, Category="Chip SMD Resistors", ComponentLink1Description=https://datasheet.ciiva.com/11821/0900766b80f80784-11821713.pdf?src-supplier=RSComponents, ComponentLink1URL=https://datasheet.ciiva.com/11821/0900766b80f80784-11821713.pdf?src-supplier=RSComponents, ComponentLink2Description=https://datasheet.ciiva.com/34303/1989527-34303643.pdf?src-supplier=Jameco, ComponentLink2URL=https://datasheet.ciiva.com/34303/1989527-34303643.pdf?src-supplier=Jameco, ComponentLink3Description=https://datasheet.ciiva.com/16780/70260748-16780490.pdf?src-supplier=Allied+Electronics, ComponentLink3URL=https://datasheet.ciiva.com/16780/70260748-16780490.pdf?src-supplier=Allied+Electronics, ComponentLink4Description=https://datasheet.ciiva.com/17212/aoa0000ce2-17212477.pdf?src-supplier=Avnet+Europe, ComponentLink4URL=https://datasheet.ciiva.com/17212/aoa0000ce2-17212477.pdf?src-supplier=Avnet+Europe, ComponentLink5Description=https://datasheet.ciiva.com/30143/aoa0000ce2-30143461.pdf?src-supplier=Onlinecomponents.com, ComponentLink5URL=https://datasheet.ciiva.com/30143/aoa0000ce2-30143461.pdf?src-supplier=Onlinecomponents.com, ComponentLink6Description=https://datasheet.ciiva.com/16782/70260748-16782856.pdf?src-supplier=Allied+Electronics, ComponentLink6URL=https://datasheet.ciiva.com/16782/70260748-16782856.pdf?src-supplier=Allied+Electronics, ComponentLink7Description=https://datasheet.ciiva.com/9194/aoa0000ce2-9194794.pdf?src-supplier=Avnet, ComponentLink7URL=https://datasheet.ciiva.com/9194/aoa0000ce2-9194794.pdf?src-supplier=Avnet, ComponentLink8Description=https://datasheet.ciiva.com/46373/426256-46373996.pdf?src-supplier=Element14, ComponentLink8URL=https://datasheet.ciiva.com/46373/426256-46373996.pdf?src-supplier=Element14, ComponentLink9Description=https://datasheet.ciiva.com/28675/1678782-28675837.pdf?src-supplier=Element14, ComponentLink9URL=https://datasheet.ciiva.com/28675/1678782-28675837.pdf?src-supplier=Element14, ComponentLink10Description=https://datasheet.ciiva.com/5868/426256-5868191.pdf?src-supplier=Farnell, ComponentLink10URL=https://datasheet.ciiva.com/5868/426256-5868191.pdf?src-supplier=Farnell, Composition="Thick Film", Contact Plating=Tin, Depth=1.25mm, Features="Automotive AEC-Q200", Height=0.6mm, Lead Free="Lead Free", Length=2mm, Manufacturer Part Number=ERJ-6ENF7501V, Military Standard=Not, Mount="Surface Mount", Number of Terminations=2, Packaging="Tape and Reel", Power Rating=125mW, Pricing 1="1=0,10000, 10=0,07200, 100=0,02750, 1000=0,01210, 2500=0,01045 (USD)", Radiation Hardening=No, REACH SVHC=Unknown, RoHS=Yes, Stock 1=1517, Supplier 1=Digi-Key, Termination=SMD/SMT, Voltage Rating (DC)=150V, Width=0.049inch
U1 U2: library part TL783CKTTR, "Linear Regulator, Adjustable, 20V primary input, 1.25V to 125V/700 mA/1 Output, TO-263-3", Case/Package=TO-263, Dropout Voltage=10V, Manufacturer="Texas Instruments", Max Input Voltage=150V, Max Operating Temperature=125°C, Max Output Current=700mA, Max Output Voltage=125V, Min Input Voltage=21.5V, Min Operating Temperature=0°C, Min Output Voltage=1.25V, Package Quantity=1, Power Supply Rejection Ratio (PSRR)=76dB, Quiescent Current=15mA, Reference Voltage=1.3V, Supplier Part Number 1=296-20778-1-ND, Category="Voltage Regulators - Linear", ComponentLink1Description=https://datasheet.ciiva.com/26904/tl783ckttr-26904070.pdf?src-supplier=IIIC, ComponentLink1URL=https://datasheet.ciiva.com/26904/tl783ckttr-26904070.pdf?src-supplier=IIIC, ComponentLink2Description=https://datasheet.ciiva.com/41462/001014601-da-01-en-ic-reg-ldo-adj-0-tl783ckttr-to-263-3-tid-41462450.pdf?src-supplier=Conrad, ComponentLink2URL=https://datasheet.ciiva.com/41462/001014601-da-01-en-ic-reg-ldo-adj-0-tl783ckttr-to-263-3-tid-41462450.pdf?src-supplier=Conrad, ComponentLink3Description=https://datasheet.ciiva.com/2045/tl783-2045197.pdf?src-supplier=Digi-Key, ComponentLink3URL=https://datasheet.ciiva.com/2045/tl783-2045197.pdf?src-supplier=Digi-Key, ComponentLink4Description=https://datasheet.ciiva.com/2045/tl783-2045199.pdf?src-supplier=Digi-Key, ComponentLink4URL=https://datasheet.ciiva.com/2045/tl783-2045199.pdf?src-supplier=Digi-Key, ComponentLink5Description=https://datasheet.ciiva.com/3224/tl783-3224203.pdf?src-supplier=Avnet, ComponentLink5URL=https://datasheet.ciiva.com/3224/tl783-3224203.pdf?src-supplier=Avnet, ComponentLink6Description=https://datasheet.ciiva.com/2045/tl783-2045198.pdf?src-supplier=Digi-Key, ComponentLink6URL=https://datasheet.ciiva.com/2045/tl783-2045198.pdf?src-supplier=Digi-Key, Height=4.44mm, Lead Free="Lead Free", Length=10.18mm, Manufacturer Part Number=TL783CKTTR, Min Current Limit=700mA, Mount="Surface Mount", Number of Outputs=1, Number of Pins=3, Number of Regulators=1, Output Current=700mA, Output Type=Adjustable, Output Voltage=125V, Packaging="Tape and Reel", Polarity=Positive, Pricing 1="1=2,39000, 10=2,14700, 25=2,02520, 100=1,62000, 250=1,41752 (USD)", Radiation Hardening=No, REACH SVHC="No SVHC", RoHS=Yes, Stock 1=15730, Supplier 1=Digi-Key, Weight=0.050897oz, Width=8.41mm
U3 U4: library part LM5050MK-2/NOPB, "IC OR CTRLR N+1 6SOT", Case/Package=SOT-23-6, Manufacturer="TI National Semiconductor", Max Operating Temperature=125°C, Max Output Voltage=12V, Max Supply Voltage=75V, Min Operating Temperature=-40°C, Min Supply Voltage=6V, Operating Supply Current=355uA, Quiescent Current=400uA, Supplier Part Number 1=LM5050MK-2/NOPBCT-ND, Category=Uncategorized, ComponentLink1Description=https://datasheet.ciiva.com/28632/1787943-28632260.pdf?src-supplier=Element14, ComponentLink1URL=https://datasheet.ciiva.com/28632/1787943-28632260.pdf?src-supplier=Element14, ComponentLink2Description=https://datasheet.ciiva.com/6609/lm5050-2-6609558.pdf?src-supplier=Digi-Key, ComponentLink2URL=https://datasheet.ciiva.com/6609/lm5050-2-6609558.pdf?src-supplier=Digi-Key, ComponentLink3Description=https://datasheet.ciiva.com/12085/lm5050-2-52065-12085161.pdf?src-supplier=Mouser, ComponentLink3URL=https://datasheet.ciiva.com/12085/lm5050-2-52065-12085161.pdf?src-supplier=Mouser, ComponentLink4Description=https://datasheet.ciiva.com/15110/getdatasheetpartid-494613-15110415.pdf?src-supplier=Verical, ComponentLink4URL=https://datasheet.ciiva.com/15110/getdatasheetpartid-494613-15110415.pdf?src-supplier=Verical, ComponentLink5Description=https://datasheet.ciiva.com/6609/lm5050-2-6609559.pdf?src-supplier=Digi-Key, ComponentLink5URL=https://datasheet.ciiva.com/6609/lm5050-2-6609559.pdf?src-supplier=Digi-Key, ComponentLink6Description=https://datasheet.ciiva.com/6609/lm5050-2-6609561.pdf?src-supplier=Digi-Key, ComponentLink6URL=https://datasheet.ciiva.com/6609/lm5050-2-6609561.pdf?src-supplier=Digi-Key, Contact Plating=Tin, Height=1mm, Lead Free="Lead Free", Length=3.05mm, Manufacturer Part Number=LM5050MK-2/NOPB, Mount="Surface Mount", Number of Outputs=1, Number of Pins=6, Packaging="Tape and Reel", Pricing 1="1=2,21000, 10=1,98200, 25=1,87000, 100=1,49600, 250=1,30900, 500=1,27160 (USD)", Radiation Hardening=No, REACH SVHC="No SVHC", RoHS=Yes, Stock 1=29342, Supplier 1=Digi-Key, Weight=0.00127oz, Width=1.75mm
U5: library part ZXTR2012K-13, "LINEAR 12V 60MA TO252-3", Case/Package=TO-252-3, Manufacturer=Diodes, Max Input Voltage=100V, Max Operating Temperature=125°C, Max Output Current=60mA, Max Power Dissipation=2.3W, Min Input Voltage=15V, Min Operating Temperature=-40°C, Output Voltage=12V, Package Quantity=2500, Quiescent Current=900uA, Supplier Part Number 1=ZXTR2012K-13DICT-ND, Accuracy=10%, Category="Voltage Regulators - Linear", ComponentLink1Description=https://datasheet.ciiva.com/30009/zxtr2012k-30009732.pdf?src-supplier=Avnet, ComponentLink1URL=https://datasheet.ciiva.com/30009/zxtr2012k-30009732.pdf?src-supplier=Avnet, ComponentLink2Description=https://datasheet.ciiva.com/29568/zxtr2012k-29568982.pdf?src-supplier=Digi-Key, ComponentLink2URL=https://datasheet.ciiva.com/29568/zxtr2012k-29568982.pdf?src-supplier=Digi-Key, ComponentLink3Description=https://datasheet.ciiva.com/29568/zxtr2012k-29568983.pdf?src-supplier=Digi-Key, ComponentLink3URL=https://datasheet.ciiva.com/29568/zxtr2012k-29568983.pdf?src-supplier=Digi-Key, ComponentLink4Description=https://datasheet.ciiva.com/29568/zxtr2012k-29568981.pdf?src-supplier=Digi-Key, ComponentLink4URL=https://datasheet.ciiva.com/29568/zxtr2012k-29568981.pdf?src-supplier=Digi-Key, Height=2.26mm, Length=6.7mm, Manufacturer Part Number=ZXTR2012K-13, Mount="Surface Mount", Number of Outputs=1, Number of Pins=3, Number of Regulators=1, Output Current=60mA, Output Type=Fixed, Packaging="Tape and Reel", Polarity=Positive, Power Rating=2.3W, Pricing 1="1=0,64000, 10=0,54500, 25=0,50920, 100=0,37810, 250=0,31996, 500=0,30542, 1000=0,22543 (USD)", Radiation Hardening=No, RoHS=Yes, Stock 1=1248, Supplier 1=Digi-Key, Width=6.2mm

## Via types
v1: diameter 1.1, hole 0.6, Top Layer to Bottom Layer, tented both sides, 23 vias
v2: diameter 0.8, hole 0.4, Top Layer to Bottom Layer, tented both sides, 11 vias

## Nets (pads, with @x,y where several pads share a name; then routed paths per layer and width w, separated by ;. In a path a pad name is that pad's centre, name@x,y a point inside that pad or via, vN(x,y) a via of type N, cw(c..) or ccw(c..) an arc to the next point about the centre after c; other vN are vias at no path point)
+3V3: C1.2 D1.2 J3.1 R1.2 U1.2 | length 39.5
  Top Layer w0.4: v2(13.9,13.725) 14.25,13.725 15.05,14.525 15.05,14.75 15.425,15.125 D1.2
  Bottom Layer w0.4: U1.2@12.449,22.2 12.477,22.172 23.173,22.172 U1.2@23.201,22.2 ; R1.2 12.75,14.325 13.273,13.802 13.823,13.802 v2(13.9,13.725) ; R1.2@13.025,15.65 14.65,17.275 14.65,22.15 ; U1.2@23.302,22.15 25.25,20.202 C1.2
  Bottom Layer w1.2: U1.2@23.302,22.15 23.302,23 27.002,26.7 J3.1
+5V: C2.2 D2.2 J3.11 R3.2 U2.2 | length 40.2
  Top Layer w0.4: v2(17.25,12) D2.2
  Bottom Layer w0.4: R3.2 11.3,1.475 10.3,2.475 10.3,4.65 U2.2@11.494,5.844 ; v2(17.25,12) 18.256,10.994 19.202,10.994 U2.2@22.5,7.696 ; C2.2 U2.2@22.5,7.696 ; U2.2@23.302,5.844 22.5,6.646 U2.2@22.5,7.696
  Bottom Layer w1: U2.2@12.449,5.844 15.552,5.844 15.555,5.841 23.198,5.841 U2.2@23.201,5.844
  Bottom Layer w1.2: U2.2@23.302,5.844 23.302,5 27.002,1.3 J3.11
+12V: C5.2 D3.2 J3.3 U5.3 | length 20.2
  Top Layer w0.254: D3.2 19.125,12.875 19.573,13.323 19.573,13.398 20.3,14.125 20.3,16.925 21.275,17.9 21.65,17.9 U5.3
  Top Layer w1: U5.3 22.059,18.309 22.059,19.759 22.825,20.525 C5.2 22.825,23.021 23.411,23.607 27.368,23.607 29.259,21.716 29.904,21.716 J3.3
+48_BACKUP: D5.1 D8.1 F2.2 M2.1 M2.2 M2.3 U4.4 | length 5.5
  Bottom Layer w1.2: D8.1 2.325,12.025 2.5,11.85 2.5,8.116 2.992,7.624 D5.1
  other v1: 15.575,1.5 15.575,3.125 2.675,5.5 4.3,5.5 9.875,8.085 9.85,9.76
+48_MAIN: D4.1 D7.1 F1.2 M1.1 M1.2 M1.3 U3.4 | length 11.5
  Top Layer w0.4: v1(9.8,18.75) 9.666,18.616 9.666,18.249 9.583,18.166 9.583,17.834 10.279,17.138 10.279,15.571 11.05,14.8 11.925,14.8 U3.4
  Bottom Layer w0.6: D7.1@1.9,15.8 D7.1
  Bottom Layer w1.2: D7.1@1.9,15.8 2.375,15.8 2.5,15.925 2.5,16.628 2.5,19.884 2.992,20.376 D4.1
  other v1: 9.85,20.375 2.7,22.5 4.325,22.5 15.65,24.8 15.65,26.5
+48_PROT: C3.2 C4.2 C6.2 J3.5 J3.6 J3.7 M1.5 M1.6 M1.7 M1.8 M2.5 M2.6 M2.7 M2.8 U1.3 U2.3 U3.6 U4.6 U5.2 | length 43.8
  Top Layer w0.254: v1@15.98,17.195 v1@16.27,17.485
  Top Layer w0.4: U4.6 13.017,13.225 15.644,10.598 15.644,9.673 17.165,8.152 ; U3.6 12.075,16.55 12.638,16.55 13.002,16.186 14.846,16.186 15.855,17.195 v1@15.98,17.195 ; v1(14.376,23.401) 15.277,22.5 18.35,22.5 19.165,21.685 M1.8
  Top Layer w1: C6.2 26.5,9.483 U5.2 26.589,14 J3.6
  Bottom Layer w0.254: U2.3@13.052,8.384 U2.3@13.425,8.757
  Bottom Layer w0.4: U2.3@11.25,8.684 11.55,8.384 U2.3@13.052,8.384 ; U1.3 13.263,24.74 14.376,23.627 v1(14.376,23.401) ; U1.3@13.225,24.79 13.425,24.99 C3.2 ; U1.3@13.326,24.69 13.479,24.69 U1.3@13.729,24.44 ; U2.3@13.425,8.757 C4.2
  Bottom Layer w1: U2.3@13.052,8.384 14.882,8.384 16.068,9.57 v1@16.095,9.57
  other v1: 16.095,7.245 16.095,9.62 16.12,17.485 16.12,19.985
GND: C1.1 C2.1 C3.1 C4.1 C5.1 C6.1 D4.2 D5.2 D7.2 D8.2 J1.2 J2.2 J3.2 J3.4 J3.8 J3.9 J3.10 R2.1 R4.1 R5.1 R6.1 R7.1 U3.2 U4.2 U5.1 | length 43.4
  Top Layer w0.4: v2(8.25,15.7) U3.2 ; v2(8.3,12.275) U4.2
  Top Layer w0.6: R4.1@24.75,5.65 25.05,5.65 25.15,5.55 C6.1 29.035,5.55 J3.9@29.865,6.38
  Top Layer w1: C5.1 25.925,20.9 26.513,20.312 26.513,18.309 U5.1 ; J3.9@29.865,6.38 J3.9
  Top Layer w1.2: U5.1@26.613,19.023 29.943,19.023 J3.4
  Bottom Layer w0.4: D4.2 3.649,26.475 C3.1 C3.1@11.475,26.525 ; v2(8.25,15.7) 8.262,15.687 10.737,15.687 R2.1 ; v2(8.3,12.275) 9.8,12.275 11.475,10.6 C4.1@11.475,10.45 ; v2(14.101,14.801) 15.249,14.801 15.449,15.001 15.5,14.95 15.8,14.95 16.146,14.604 16.146,14.069 16.8,13.415 16.8,13.2 16.95,13.05 R6.1 R7.1@19.05,13.05 ; v2@21.2,15.55 C2.1 ; C1.1 25.3,12.5 v2(28,12.5)
  Bottom Layer w0.6: v1@6.2,17.5 v1(6.25,17.45) D7.2 D7.2@6.45,15.55 ; v1(6.275,10.325) D8.2
  other v1: 2.675,3.4 4.3,3.4 2.7,24.6 4.325,24.6
  other v2: 21.214,15.697
NetD1_1: D1.1 R5.2 | length 3.2
  Top Layer w0.4: D1.1 16,12.375 15.8,12.175 v2(15.8,11.65)
  Bottom Layer w0.4: R5.2 15.65,13.05 15.8,12.9 v2(15.8,11.65)
NetD2_1: D2.1 R6.2 | length 2.4
  Top Layer w0.4: D2.1 17.151,15.026 17.634,14.543 17.626,14.535 v2(17.626,14.126)
  Bottom Layer w0.4: R6.2@17.25,14.95 17.476,14.95 17.626,14.8 v2(17.626,14.126)
NetD3_1: D3.1 R7.2 | length 1.7
  Top Layer w0.4: D3.1 19.125,15.05 v2(19.125,14.2)
  Bottom Layer w0.4: R7.2@19.05,14.95 19.125,14.875 v2(19.125,14.2)
NetF1_1: F1.1 J1.1
NetF2_1: F2.1 J2.1
NetM1_4: M1.4 U3.5 | length 5.4
  Top Layer w0.4: U3.5 11.875,15.8 11.333,15.8 10.933,16.2 10.933,17.17 11.167,17.404 13.036,17.404 13.39,17.05 13.72,17.05 M1.4
NetM2_4: M2.4 U4.5 | length 8.5
  Top Layer w0.254: U4.5 13.094,12.275 14.841,10.528 14.841,6.941 14.155,6.255 M2.4
NetR1_1: R1.1 R2.2 U1.1 | length 3.7
  Bottom Layer w0.4: R2.2 R1.1 ; U1.1@12.55,19.61 12.75,19.41 12.75,17.95
NetR3_1: R3.1 R4.2 U2.1 | length 17
  Top Layer w0.4: v2(14.15,4.525) 21.425,4.525 24.45,7.55 R4.2 R4.2@24.75,7.55
  Bottom Layer w0.4: R3.1 13.2,3.004 12.9,3.304 U2.1 13.449,3.304 14.073,3.928 14.073,4.448 v2(14.15,4.525)
pads on no net: U3.1 U3.3 U4.1 U4.3